# Altium PCB PCB1.PcbDoc (part 1 of 2)
Units mil, origin at the board's own origin, x right, y up, seen from the top; angles counter-clockwise.
Board outline 3297.75 x 2522.53 mil, 2 copper layers (Top Layer, Bottom Layer); 134 components, 99 nets, 411 pads, 89 vias.
Unrouted connection lines stored in the file: 1.
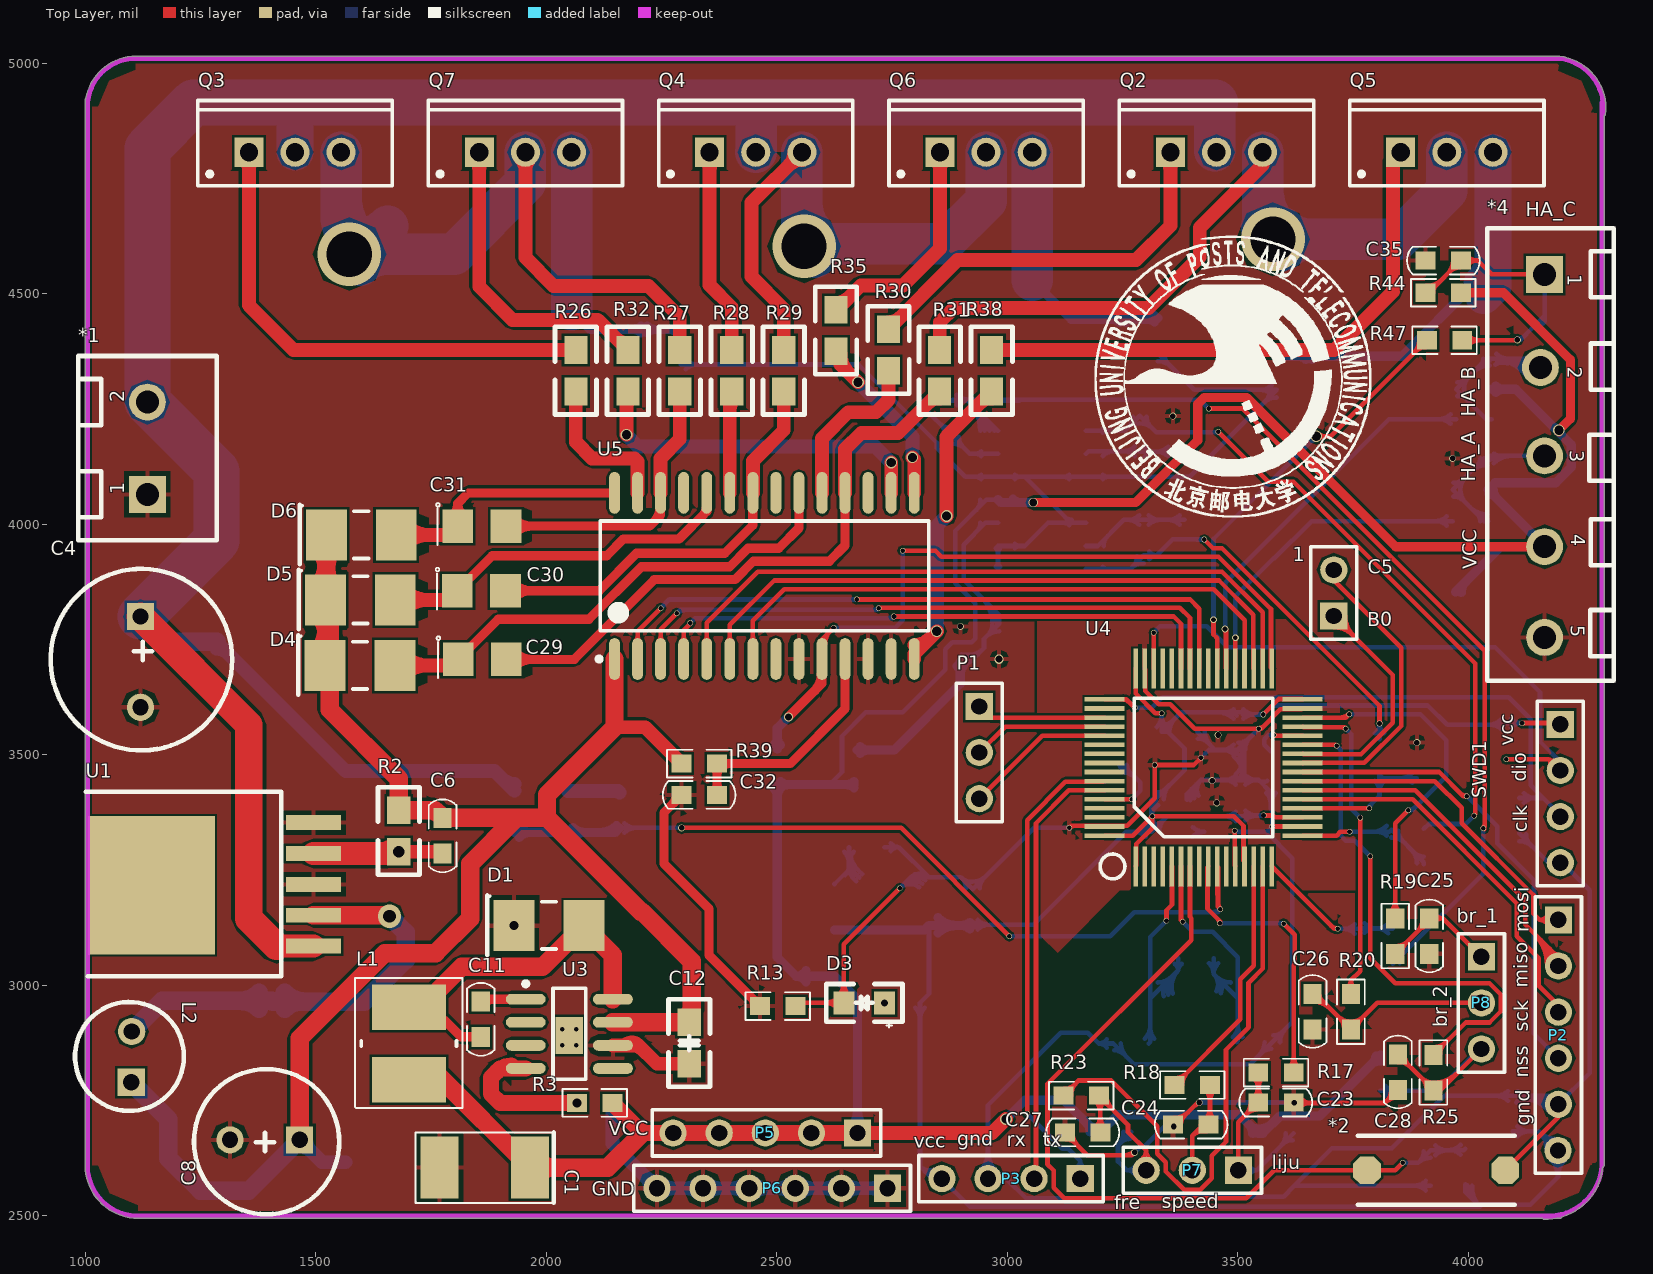
[diagram p0: Top Layer view]
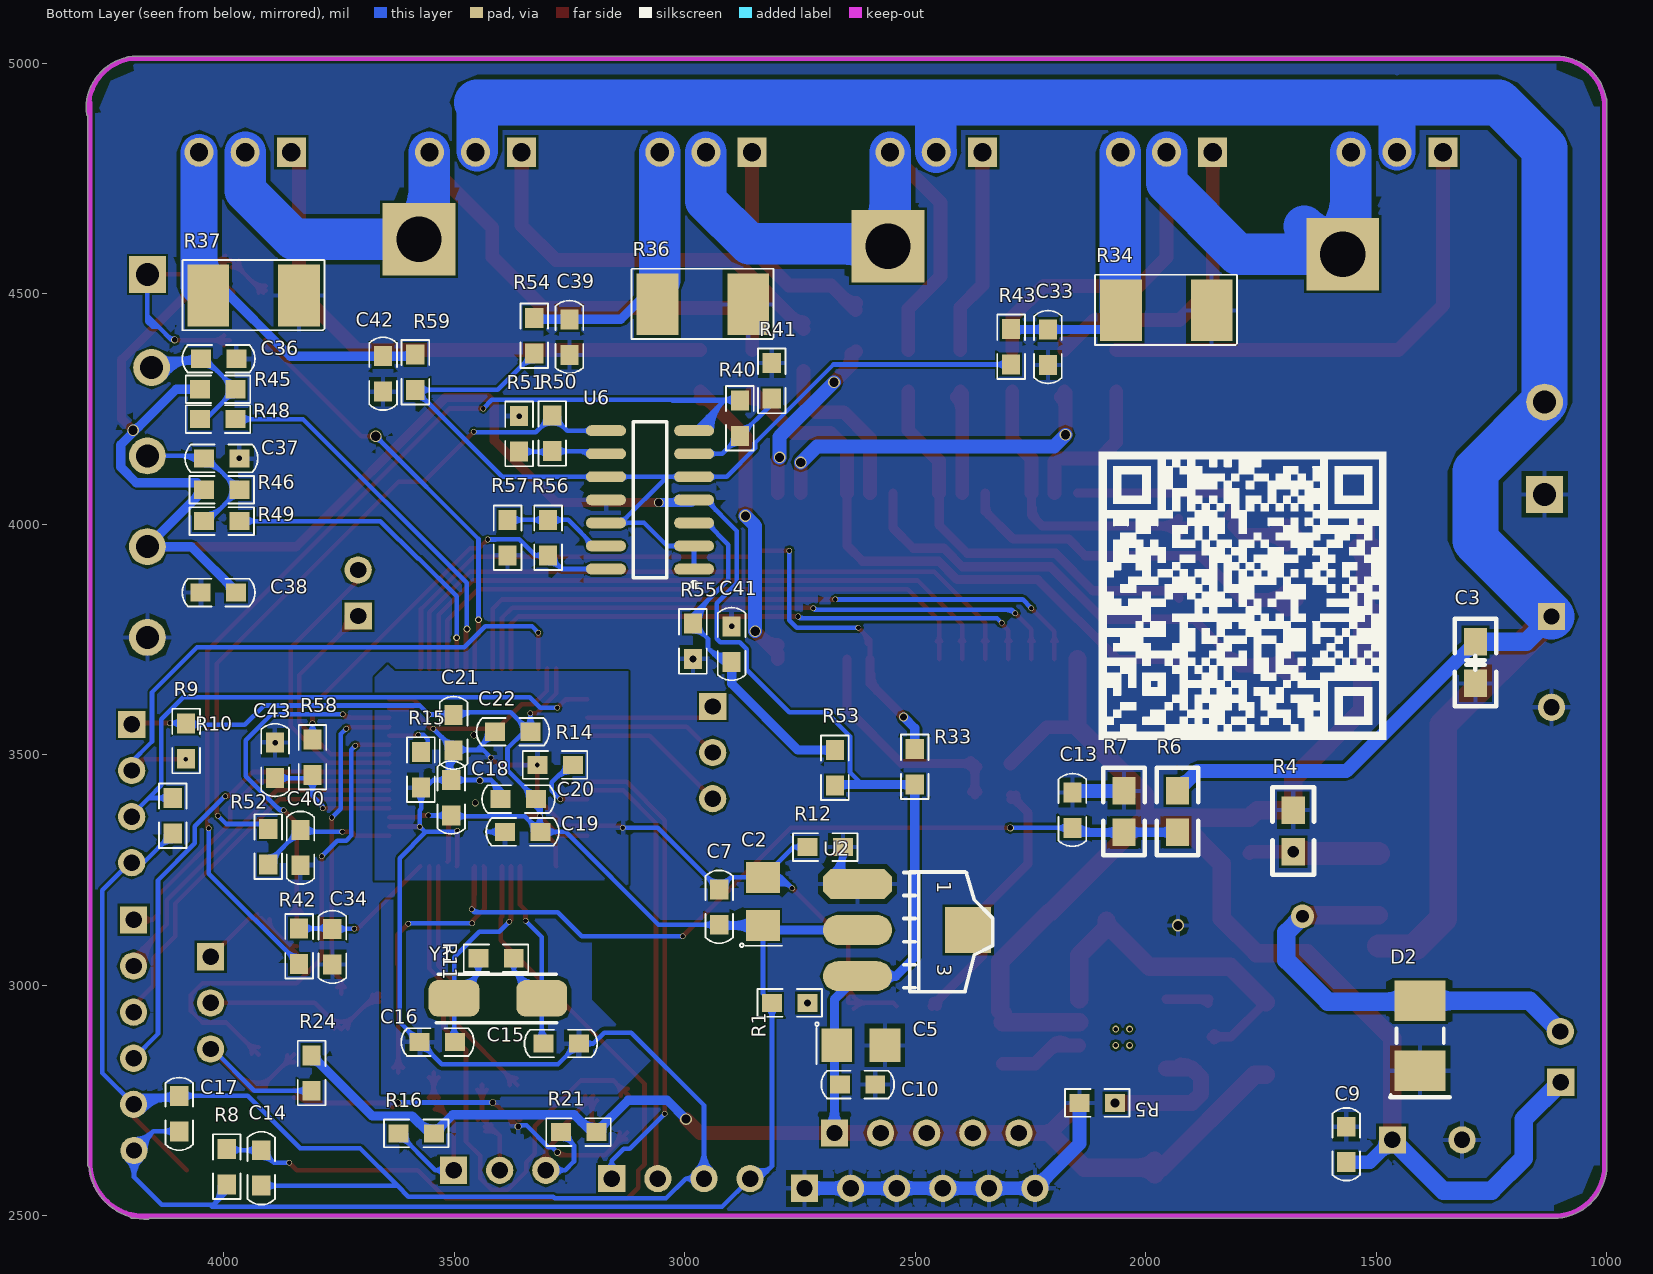
[diagram p1: Bottom Layer view, seen from below]

## Layer stack, top to bottom
Top Layer: signal copper 1.4
Dielectric: dielectric 12.6, FR-4, Dk 4.8
Bottom Layer: signal copper 1.4

## Board outline
1115,2494.99 4161.48,2494.99 ccw(c4164,2495) 4163.95,2492.49 ccw(c4166.5,2617.5) 4191.5,2494.99 4198,2494.99 ccw(c4198,2500) 4202.48,2497.75 ccw(c4166.5,2617.5) 4290.95,2605.38 ccw(c4289,2610) 4294.02,2610 4294.02,4885.41 ccw(c4292,4890) 4296.98,4889.42 ccw(c4184.5,4902.5) 4297.74,4902.5 ccw(c4184.5,4902.5) 4197.58,5014.98 ccw(c4197,5010) 4197.55,5014.98 ccw(c4197,5010) 4197,5015.02 1110,5015.02 ccw(c1110,4905) 1001.58,4923.67 ccw(c1005,4920) 999.99,4920 999.99,2610 999.98,2610 cw(c1005,2610) 999.99,2610.03 999.98,2610 ccw(c1115,2610)

## Design rules (kind name [scope] priority, off if disabled: settings)
Clearance [All] p1: gap=5
PolygonConnect [All] p1: connectstyle=Relief reliefconductorwidth=10 reliefentries=4 polygonreliefangle="90 Angle" airgapwidth=10
RoutingCorners [All] p1: cornerstyle=45-Degree minsetback=20 maxsetback=100
RoutingVias [All] p1: holewidth=28 width=50 viastyle="Through Hole" minholewidth=5 minwidth=12 maxholewidth=28 maxwidth=50
SolderMaskExpansion [All] p1: expansion=4
Width [All] p1: maxlimit=100 minlimit=10 preferedwidth=10
27 further rules are at their usual default settings.

## Classes and differential pairs
component class Drive: *4 C29 C30 C31 C32 C33 C34 C35 C36 C37 C38 C39 C40 C41 C42 C43 D4 D5 D6 Q2 Q3 Q4 Q5 Q6 Q7 R26 R27 R28 R29 R30 R31 R32 R33 R34 R35 R36 R37 R38 R39 R40 R41 R42 R43 R44 R45 R46 R47 R48 R49 R50 R51 R52 R53 R54 R55 R56 R57 R58 R59 U5 U6
component class Zhuban: 1 *1 *2 C1 C2 C3 C4 C5 C6 C7 C8 C9 C10 C11 C12 C13 C14 C15 C16 C17 C18 C19 C20 C21 C22 C23 C24 C25 C26 C27 C28 D1 D2 D3 L1 L2 P1 P2 P3 P5 P6 P7 P8 R1 R2 R3 R4 R5 R6 R7 R8 R9 R10 R11 R12 R13 R14 R15 R16 R17 R18 R19 R20 R21 R23 R24 R25 SWD1 U1 U2 U3 U4 Y1

## Components (designator, comment, footprint, x,y, rotation, side; value= is the part's Value field where it differs from the comment)
1 "Head_2" HDR1X2 3708,3801 r90 top
*1 "Power" 普通二口接线柱 1135,4065 r90 top
*2 "SW" KEY 3930,2599 r180 top locked
*4 "Hall" 普通五口接线柱 4165,4542 r270 top locked
C1 "107UF" "6032C  TA" 1965,2605 r180 top
C2 "47uF  Ta" "3216A  Ta" 2830,3130 r90 bottom
C3 "104" 0805C 1285,3745 r270 bottom
C4 "330uF 63V" "Cap  电解  10mm" 1120,3800 r270 top
C5 "47uF  Ta" "3216A  Ta" 2670,2870 r180 bottom
C6 "104" "0603- C" 1775,3325 r270 top
C7 "104" "0603- C" 2925,3170 r90 bottom
C8 "100uF  50V" "Cap  电解  8mm - duplicate" 1465,2665 r180 top
C9 "104" "0603- C" 1565,2655 r90 bottom
C10 "104" "0603- C" 2625,2785 r180 bottom
C11 "104" "0603- C" 1858,2927 r270 top
C12 "10uf" 0805C 2310,2830 r90 top
C13 "104" "0603- C" 2159,3380 r90 bottom
C14 "0.1uf" "0603- C" 3918,2604 r270 bottom
C15 "20PF" "0603- C" 3268,2874 r0 bottom
C16 "20PF" "0603- C" 3536,2877 r180 bottom
C17 "Cap" "0603- C" 4096,2722 r270 bottom
C18 "0.1UF" "0603- C" 3506,3407 r90 bottom
C19 "Cap" "0603- C" 3351,3333 r0 bottom
C20 "Cap" "0603- C" 3361,3404 r180 bottom
C21 "Cap" "0603- C" 3501,3548 r270 bottom
C22 "Cap" "0603- C" 3373,3550 r180 bottom
C23 "104" "0603- C" 3582.54,2746 r180 top
C24 "104" "0603- C" 3398,2698 r0 top
C25 "104" "0603- C" 3915,3107 r90 top
C26 "104" "0603- C" 3662,2943 r90 top
C27 "104" "0603- C" 3163,2681 r0 top
C28 "104" "0603- C" 3847,2812 r90 top
C29 "钽电容" "3216A  Ta" 1809,3707 r0 top
C30 "钽电容" "3216A  Ta" 1807,3856 r0 top
C31 "钽电容  1Uf" "3216A  Ta" 1808,3996 r0 top
C32 "104" "0603- C" 2332,3413 r180 top
C33 "104" "0603- C" 2212,4384 r90 bottom
C34 "104" "0603- C" 3764,3084 r270 bottom
C35 "104" "0603- C" 3945,4572 r0 top
C36 "104" "0603- C" 4010,4359 r0 bottom
C37 "104" "0603- C" 4004,4143 r0 bottom
C38 "104" "0603- C" 4011,3852 r180 bottom
C39 "104" "0603- C" 3250,4406 r90 bottom
C40 "104" "0603- C" 3833,3299 r270 bottom
C41 "104" "0603- C" 2898,3740 r90 bottom
C42 "104" "0603- C" 3654,4326 r90 bottom
C43 "104" "0603- C" 3888,3488 r90 bottom
D1 "D" "D RS1M" 1930,3130 r0 top
D2 "SS14" "D RS1M" 1405,2815 r90 bottom
D3 "D_2" 0805D 2733.54,2962 r180 top
D4 "RS1M" "D RS1M" 1520,3694 r0 top
D5 "RS1M" "D RS1M" 1521,3836 r0 top
D6 "RS1M  FR107" "D RS1M" 1523,3977 r0 top
L1 "L" CD_54 1702,2874 r270 top
L2 "100uH 500Ma" "L  电感  6mm" 1100,2790 r90 top
P1 "Head_3" HDR1X3 2939,3605 r270 top
P2 "Header 6" "HDR1X6- duplicate" 4195,3142 r270 top
P3 "" HDR1X4 3158,2581 r180 top
P5 "Head_5" HDR1X5 2675,2680 r180 top
P6 "Header 6" HDR1X6 2740,2560 r180 top
P7 "Head_3" HDR1X3 3501,2599 r180 top
P8 "Head_3" HDR1X3 4028,3062 r270 top
Q2 "IRF540NS" "TO-220AB  MOS" 3453.42,4806.86 r0 top
Q3 "IRF540NS" "TO-220AB  MOS" 1455.14,4806.86 r0 top
Q4 "IRF540NS" "TO-220AB  MOS" 2454.28,4806.86 r0 top
Q5 "IRF540NS" "TO-220AB  MOS" 3953,4806.86 r0 top
Q6 "IRF540NS" "TO-220AB  MOS" 2953.85,4806.86 r0 top
Q7 "IRF540NS" "TO-220AB  MOS" 1954.71,4806.86 r0 top
R1 "1K" 0603-R 2772,2962 r0 bottom
R2 "27KK 1%" 0805R 1680,3290 r90 top
R3 "10K" 0603-R 2105,2745 r0 top
R4 "2.4K1%" 0805R 1680,3380 r270 bottom
R5 "3.24K" 0603-R 2105,2745 r0 bottom
R6 "20K" 0805R 1931,3332 r90 bottom
R7 "1K" 0805R 2047,3421.87 r270 bottom
R8 "10K" 0603-R 3993,2607 r270 bottom
R9 "10K" 0603-R 4081,3530 r90 bottom
R10 "10K" 0603-R 4110,3368 r90 bottom
R11 "1M" 0603-R 3409,3059 r180 bottom
R12 "0" 0603-R 2695,3300 r0 bottom
R13 "0" 0603-R 2502,2955 r0 top
R14 "10K" 0603-R 3281,3478 r0 bottom
R15 "10K" 0603-R 3572,3468 r270 bottom
R16 "10K" 0603-R 3582,2679 r180 bottom
R17 "68R" 0603-R 3582.54,2811 r0 top
R18 "68R" 0603-R 3401,2784 r180 top
R19 "68R" 0603-R 3841,3107 r90 top
R20 "68R" 0603-R 3745,2943 r90 top
R21 "10K" 0603-R 3230,2682 r180 bottom
R23 "68R" 0603-R 3160,2761 r180 top
R24 "10K" 0603-R 3809,2810 r90 bottom
R25 "68R" 0603-R 3924,2811 r90 top
R26 "22R" 0805R 2064,4288 r90 top
R27 "68R" 0805R 2289.5,4288 r90 top
R28 "68R" 0805R 2402.25,4288 r90 top
R29 "68R" 0805R 2515,4288 r90 top
R30 "68R" 0805R 2742,4333 r90 top
R31 "68R" 0805R 2853.25,4288 r90 top
R32 "68R" 0805R 2176.75,4288 r90 top
R33 "5K1" 0603-R 2501,3474 r90 bottom
R34 "0.02R 1%  采样电阻" 2512R 1857,4464 r0 bottom
R35 "68R" 0805R 2628,4375 r90 top
R36 "0.002R" 2512R 2862,4477 r0 bottom
R37 "0.002R" 2512R 3836,4496 r0 bottom
R38 "22R" 0805R 2966,4288 r90 top
R39 "68R" 0603-R 2332,3481 r0 top
R40 "2K 1%" 0603-R 2880,4230 r270 bottom
R41 "1K1%" 0603-R 2811,4311 r90 bottom
R42 "1K1%" 0603-R 3836,3085 r270 bottom
R43 "68R" 0603-R 2292,4385 r90 bottom
R44 "10K  1%" 0603-R 3945,4502 r180 top
R45 "10K  1%" 0603-R 4012,4293 r180 bottom
R46 "10K  1%" 0603-R 4004,4075 r180 bottom
R47 "0R" 0603-R 3948,4399 r0 top
R48 "R" 0603-R 4012,4228 r0 bottom
R49 "R" 0603-R 4004,4007 r0 bottom
R50 "2K 1%" 0603-R 3287,4197 r270 bottom
R51 "1K1%" 0603-R 3359,4196 r90 bottom
R52 "1K1%" 0603-R 3903,3301 r90 bottom
R53 "10K  1%" 0603-R 2674,3472 r90 bottom
R54 "1K1%" 0603-R 3326,4409 r90 bottom
R55 "4.7K  1%" 0603-R 2982,3746 r270 bottom
R56 "2K 1%" 0603-R 3296,3971 r90 bottom
R57 "1K1%" 0603-R 3384,3971 r270 bottom
R58 "1K1%" 0603-R 3807,3495 r90 bottom
R59 "1K1%" 0603-R 3584,4330 r90 bottom
SWD1 "Head 4" HDR1X4 4199,3566 r270 top
U1 "LM2576HV—ADJ" LM 1495,3085 r90 top locked
U2 "ASM1117-3.3" AMS1117 2625,3220 r270 bottom
U3 "TPS5430" SOIC-8piN 2050,2895 r0 top
U4 "STM32F103RBT6" LQFP64 3278,3258 r90 top locked
U5 "IR2136" "IR2136S SOIC-28" 2473,3888 r90 top locked
U6 "LM324" SOP-14N 3075,4053 r0 bottom locked
Y1 "8M" OSC-5032 3420,2967 r180 bottom

## Footprints (in the part's own frame and the unit in brackets; to place one, negate y for a bottom-side part, rotate by r counter-clockwise, add the part's x,y. Pads: shape width x height; smd on the part's side, far side on the other; paste and mask are expansions set on the pad)
"0603- C" [mm] "贴片带丝印"
  rect 1.1x1 smd: 1(-0.977,0) 2(0.977,0)
  silkscreen extent -1.99,-0.76 2.02,0.76, body extent -1.14,-0.38 1.14,0.38, height 1
0603-R [mm] "贴片带丝印"
  rect 1.1x1 smd: 1(-0.977,0) 2(0.977,0)
  silkscreen extent -1.78,-0.76 1.78,0.76, body extent -1.14,-0.38 1.14,0.38, height 1
0805C [mil]
  rect 60x50 smd: 1(0,0) 2(90,0)
  silkscreen extent -50,-45 140,45
0805D [mil]
  rect 45x50 smd: A(0,0) K(88,0)
  silkscreen extent -39,-41 126,54
0805R [mil]
  rect 60x50 smd: 1(0,0) 2(90,0)
  silkscreen extent -50,-45 140,45
2512R [mm]
  rect 2.3x3.4 smd: 1(0,0) 2(5,0)
  silkscreen extent -1.4,-1.96 6.43,1.91, body extent -0.7,-1.7 5.7,1.7, height 0.7
"3216A  Ta" [mm] "Chip Capacitor, 2-Leads, Body 3.30x1.70mm, IPC Medium Density"
  rect 1.7x1.85 smd: 1(0,0) 2(2.65,0)
  silkscreen extent -1.19,-1.04 -0.99,1.27, body extent -0.38,-0.9 3.03,0.9, height 1.7
"6032C  TA" [mm]
  rect 2.1x3.4 smd: 1(0,0) 2(5,0)
  silkscreen extent -1.31,-1.93 6.31,1.96, body extent -0.6,-1.7 5.6,1.7, height 2.9
AMS1117 [mil]
  oct 65x150 smd: 1(0.03,-0.06)
  oval 65x150 smd: 2(100.03,-0.06) 3(200.03,-0.06)
  rect 100x100 smd: 4(100.03,239.94)
  silkscreen extent -26,100 234,293
"Cap  电解  8mm - duplicate" [mm] "Connector; Header; 3 Position"
  rect 1.5x1.5 hole 0.9: 1(0,0)
  round 1.5 hole 0.9: 2(3.835,0)
  silkscreen extent -2.18,-3.9 5.82,4.1
"Cap  电解  10mm" [mm] "Connector; Header; 3 Position"
  rect 1.5x1.5 hole 0.9: 1(0,0)
  round 1.5 hole 0.9: 2(5,0)
  silkscreen extent -2.62,-4.95 7.37,5.05
CD_54 [mm]
  rect 2.5x4.064 smd: 1(-2,0) 2(2,0)
  silkscreen extent -3.61,-2.97 3.56,2.95, body extent -3,-2.7 3,2.7, height 4
"D RS1M" [mm]
  rect 2.25x2.8 smd: A(0,0) K(3.85,0)
  silkscreen extent -1.47,-1.63 2.32,1.66, body extent -0.72,-1.4 4.57,1.39, height 2.3
HDR1X2 [mm]
  rect 1.5x1.5 hole 0.9: 1(0,0)
  round 1.5 hole 0.9: 2(2.54,0)
  silkscreen extent -1.27,-1.27 3.81,1.27
HDR1X3 [mm] "Connector; Header; 3 Position"
  rect 1.5x1.5 hole 0.9: 1(0,0)
  round 1.5 hole 0.9: 2(2.54,0) 3(5.08,0)
  silkscreen extent -1.27,-1.27 6.35,1.27
HDR1X4 [mm]
  rect 1.5x1.5 hole 0.9: 1(0,0)
  round 1.5 hole 0.9: 2(2.54,0) 3(5.08,0) 4(7.62,0)
  silkscreen extent -1.27,-1.27 8.89,1.27
HDR1X5 [mm]
  rect 1.5x1.5 hole 0.9: 1(0,0)
  round 1.5 hole 0.9: 2(2.54,0) 3(5.08,0) 4(7.62,0) 5(10.16,0)
  silkscreen extent -1.27,-1.27 11.3,1.27
HDR1X6 [mm]
  rect 1.5x1.5 hole 0.9: 1(0,0)
  round 1.5 hole 0.9: 2(2.54,0) 3(5.08,0) 4(7.62,0) 5(10.16,0) 6(12.7,0)
  silkscreen extent -1.27,-1.27 13.97,1.27
"HDR1X6- duplicate" [mm]
  rect 1.5x1.5 hole 0.9: 1(0,0)
  round 1.5 hole 0.9: 2(2.54,0) 3(5.08,0) 4(7.62,0) 5(10.16,0) 6(12.7,-0.025)
  silkscreen extent -1.27,-1.27 13.94,1.27
"IR2136S SOIC-28" [mm] "SOIC, 28-Leads, Body 17.90x7.50mm, Pitch 1.27mm, IPC Medium Density"
  oval 2.3x0.6 smd: 1(-4.575,8.255) 2(-4.575,6.985) 3(-4.575,5.715) 4(-4.575,4.445) 5(-4.575,3.175) 6(-4.575,1.905) 7(-4.575,0.635) 8(-4.575,-0.635) 9(-4.575,-1.905) 10(-4.575,-3.175) 11(-4.575,-4.445) 12(-4.575,-5.715) 13(-4.575,-6.985) 14(-4.575,-8.255) 15(4.575,-8.255) 16(4.575,-6.985) 17(4.575,-5.715) 18(4.575,-4.445) 19(4.575,-3.175) 20(4.575,-1.905) 21(4.575,-0.635) 22(4.575,0.635) 23(4.575,1.905) 24(4.575,3.175) 25(4.575,4.445) 26(4.575,5.715) 27(4.575,6.985) 28(4.575,8.255)
  silkscreen extent -4.7,-9.05 3.03,9.23, body extent -3.8,-9.05 3.8,9.05, height 2.65
KEY [mil]
  oct 60x60 smd: 1(-150,0) 2(150,0)
  silkscreen extent -170,-75 170,75
"L  电感  6mm" [mm] "Connector; Header; 3 Position"
  rect 1.5x1.5 hole 0.9: 1(0,0)
  round 1.5 hole 0.9: 2(2.794,-0.025)
  silkscreen extent -1.58,-2.9 4.42,3.1
LM [mil]
  rect 32.4x120 smd: 1(0,0)
  rect 32x120 smd: 2(67,0) 3(134,0) 4(201,0) 5(268,0)
  rect 300x275.59 smd: 6(132,351)
  silkscreen extent -65,70 335,494
LQFP64 [mm]
  rect 2.2x0.254 smd: 1(0,0) 2(0,-0.5) 3(0,-1) 4(0,-1.5) 5(0,-2) 6(0,-2.5) 7(0,-3) 8(0,-3.5) 9(0,-4) 10(0,-4.5) 11(0,-5) 12(0,-5.5) 13(0,-6) 14(0,-6.5) 15(0,-7) 16(0,-7.5) 33(10.9,-7.5) 34(10.9,-7) 35(10.9,-6.5) 36(10.9,-6) 37(10.9,-5.5) 38(10.9,-5) 39(10.9,-4.5) 40(10.9,-4) 41(10.9,-3.5) 42(10.9,-3) 43(10.9,-2.5) 44(10.9,-2) 45(10.9,-1.5) 46(10.9,-1) 47(10.9,-0.5) 48(10.9,0)
  rect 0.254x2.2 smd: 17(1.7,-9.2) 18(2.2,-9.2) 19(2.7,-9.2) 20(3.2,-9.2) 21(3.7,-9.2) 22(4.2,-9.2) 23(4.7,-9.2) 24(5.2,-9.2) 25(5.7,-9.2) 26(6.2,-9.2) 27(6.7,-9.2) 28(7.2,-9.2) 29(7.7,-9.2) 30(8.2,-9.2) 31(8.7,-9.2) 32(9.2,-9.2) 49(9.2,1.7) 50(8.7,1.7) 51(8.2,1.7) 52(7.7,1.7) 53(7.2,1.7) 54(6.7,1.7) 55(6.2,1.7) 56(5.7,1.7) 57(5.2,1.7) 58(4.7,1.7) 59(4.2,1.7) 60(3.7,1.7) 61(3.2,1.7) 62(2.7,1.7) 63(2.2,1.7) 64(1.7,1.7)
  silkscreen extent -0.68,-7.56 9.26,1.95
OSC-5032 [mil] "Molded Capacitor, 2-Leads, Body 3.20x1.60mm, IPC Medium Density"
  rrect50% 110.24x78.74 smd: 1(-80,5) 2(110,5)
  silkscreen extent -118,-48 143,57, body extent -65,-30 106,41, height 71
SOIC-8piN [mm] "SOIC, 8-Leads, Body 4.90x3.90mm, Pitch 1.27mm, IPC Medium Density"
  rect 1.528x2.036 smd: 0(0,-0.102)
  oval 2.2x0.6 smd: 1(-2.4,1.905) 2(-2.4,0.635) 3(-2.4,-0.635) 4(-2.4,-1.905) 5(2.4,-1.905) 6(2.4,-0.635) 7(2.4,0.635) 8(2.4,1.905)
  silkscreen extent -2.52,-2.5 0.9,2.88, body extent -2,-2.5 2,2.5, height 1.7
SOP-14N [mm]
  oval 2.2x0.6 smd: 1(-2.425,3.81) 2(-2.425,2.54) 3(-2.425,1.27) 4(-2.425,0) 5(-2.425,-1.27) 6(-2.425,-2.54) 7(-2.425,-3.81) 8(2.425,-3.81) 9(2.425,-2.54) 10(2.425,-1.27) 11(2.425,0) 12(2.425,1.27) 13(2.425,2.54) 14(2.425,3.81)
  silkscreen extent -2.55,-4.3 0.93,4.78, body extent -2,-4.28 2,4.28, height 1.75
"TO-220AB  MOS" [mm]
  round 1.6 hole 1: D(0,0) S(2.54,0)
  rect 1.6x1.6 hole 1: G(-2.54,0)
  silkscreen extent -5.35,-1.85 5.35,2.85, body extent -5.4,-1.9 5.4,2.9, height 19.3
普通二口接线柱 [mil]
  rect 80x80 hole 50: 1(0,0)
  round 80 hole 50: 2(200,0)
  silkscreen extent -100,-150 300,150
普通五口接线柱 [mil]
  rect 80x80 hole 50: 1(0,0)
  round 80 hole 50: 2(202,-9) 3(393.7,0) 4(590.55,0) 5(787.4,0)
  silkscreen extent -100,-124 881,150

## Part data
1: library part "Head_2  Power"
*1: library part Head_2
*2: "开关"
*4: library part Head_5
C1 C31: library part Cap_2, "钽电容"
C2 C4 C5 C8: library part Cap_1
C3 C6 C7 C9 C10 C11 C12 C13 C14 C18 C23 C24 C25 C26 C27 C28 C32 C33 C34 C39 C40 C41 C42 C43: library part Cap
C15 C16 C35 C36 C37 C38: library part C
C29 C30: library part Cap_2
D2 D4 D5 D6: library part D_1, "二极管"
D3: "发光二极管"
L1: "电感"
L2: library part L, "电感"
P2: "接插件"
P3 SWD1: library part Head_4
P6: "Header, 6-Pin"
Q2 Q3 Q4 Q5 Q6 Q7: "MOS"
R1 R2 R3 R4 R5 R6 R7 R8 R11 R12 R13 R14 R15 R16 R17 R18 R19 R20 R21 R23 R24 R25 R26 R27 R28 R29 R30 R31 R32 R33 R34 R35 R36 R37 R38 R39 R40 R41 R42 R43 R44 R45 R46 R47 R50 R51 R52 R53 R54 R55 R56 R57 R58 R59: library part R
R9 R10: library part R, "510"
U2: "3.3 稳压"
U6: "4运放SOP8芯片"
Y1: library part C-Osc, "Crystal Oscillator"

## Free pads (board coordinates)
  rect 157.48x157.48 smd far side: 0(1573,4586) 1(2559,4603) 2(3576,4618)

## Via types
v1: diameter 12, hole 10, Top Layer to Bottom Layer, 49 vias
v2: diameter 15, hole 12, Top Layer to Bottom Layer, 13 vias
v3: diameter 25, hole 20, Top Layer to Bottom Layer, 9 vias
v4: diameter 15, hole 10, Top Layer to Bottom Layer, 7 vias
v5: diameter 20, hole 15, Top Layer to Bottom Layer, 3 vias
v6: diameter 137.8, hole 98.43, Top Layer to Bottom Layer, 3 vias
v7: diameter 27, hole 20, Top Layer to Bottom Layer, 1 vias
v8: diameter 20, hole 17, Top Layer to Bottom Layer, 1 vias
v9: diameter 25, hole 20, Top Layer to Bottom Layer, tented top, 1 vias
v10: diameter 50, hole 28, Top Layer to Bottom Layer, 1 vias
v11: diameter 30, hole 25, Top Layer to Bottom Layer, 1 vias

## Nets (pads, with @x,y where several pads share a name; then routed paths per layer and width w, separated by ;. In a path a pad name is that pad's centre, name@x,y a point inside that pad or via, vN(x,y) a via of type N, cw(c..) or ccw(c..) an arc to the next point about the centre after c; other vN are vias at no path point)
"BOOT 0": R14.1 U4.60 | length 238.4
  Top Layer w10: U4.60@3211.07,3403.67 3269.33,3403.67 v1(3269.66,3404)
  Bottom Layer w10: R14.1@3242.54,3478 3250,3478 3287.88,3440.12 3287.88,3422.22 v1(3269.66,3404) ; R14.1@3244.5,3463.32 cw(c3244.5,3414.59) 3278.96,3449.04 ; R14.1@3244.5,3473.32 cw(c3244.5,3448.74) R14.1@3261.88,3466.12 ; R14.1@3259.19,3478 ccw(c3281.37,3478) 3265.69,3462.31
"BOOT 1": R15.1 U4.28 | length 127.3
  Top Layer w10: v1(3578,3543) 3579.54,3541.46 U4.28@3640.2,3541.46 ; v1@3578.71,3543.71 ccw(c3584.12,3549.12) 3584.12,3541.46
  Bottom Layer w10: R15.1@3572,3506.46 3557,3521.46 3557,3534 3566,3543 v1(3578,3543)
BREAK_1: R19.2 U4.30 | length 872
  Top Layer w10: U4.30@3640.2,3580.83 3733.83,3580.83 v1(3741,3588) ; 3721.28,3580.83 ccw(c3721.28,3607.72) v1@3740.29,3588.71 ; R19.2@3830.62,3157.82 ccw(c3805.55,3182.89) 3841,3182.89 ccw(c3876.45,3182.89) R19.2@3851.38,3157.82 ; R19.2@3841,3145.46 3841,3352 v1(3869,3380)
  Bottom Layer w10: v1(3741,3588) 3896,3588 3952,3532 3952,3453.81 3878.19,3380 v1(3869,3380) ; v1@3869,3381 ccw(c3869,3405.6) 3886.39,3388.2
BREAK_2: R20.2 U4.29 | length 737
  Top Layer w10: U4.29@3640.21,3561.15 3641.89,3559.46 3731.54,3559.46 v1(3734,3557) ; 3725.64,3559.46 cw(c3725.64,3548.64) v1@3733.29,3556.29 ; R20.2@3736.81,2995.62 ccw(c3726.47,3011) 3745,3011 ; R20.2@3745,2981.46 3745,3011 ; R20.2@3753.19,2995.62 cw(c3763.53,3011) 3745,3011 ; v1(3765,3364) 3765,3031 3745,3011
  Bottom Layer w10: v1(3734,3557) 3745.78,3545.22 3745.78,3383.22 v1(3765,3364)
EN_IR: R33.2 U4.33 U5.10 | length 1710.8
  Top Layer w10: U5.10@2598,3707.88 2598,3751 v1(2623,3776) ; U5.10@2604.81,3741.35 cw(c2644.56,3741.35) 2616.45,3769.45 ; v1(2773,3943) 2844,3943 2857,3930 3457.91,3930 3571.59,3816.32 3571.59,3688.82 U4.33@3573.27,3687.13
  Top Layer w20: v5(2525,3582) 2598,3655 U5.10@2598,3707.88 ; 2581.18,3638.18 ccw(c2544.94,3674.42) U5.10@2596.19,3674.42
  Bottom Layer w10: v1(2623,3776) 2756.87,3776 2773,3792.13 v1(2773,3943)
  Bottom Layer w20: R33.2@2494.15,3521.28 ccw(c2477.62,3537.81) 2501,3537.81 ccw(c2524.38,3537.81) R33.2@2507.85,3521.28 ; R33.2@2501,3512.46 2501,3558 v5(2525,3582)
FAULT: U4.40 U5.8
FM: U4.11
FREQUENT: R17.2 U4.9 | length 672.1
  Top Layer w10: U4.9@3435.48,3258 3434,3256.52 3434,3166 3461,3139 v1(3461,3135) ; 3456.46,3143.54 cw(c3447.93,3135) v1@3460,3135 ; v1(3599,3134) 3623,3110 3623,3046 3621,3044 R17.2@3621,2811 ; R17.2@3610.62,2821.38 ccw(c3585.55,2846.45) 3621,2846.45 ccw(c3656.45,2846.45) R17.2@3631.38,2821.38
  Bottom Layer w10: v1(3461,3135) 3598,3135 v1(3599,3134)
GND: *2.1 C2.2 C7.2 C14.2 C15.1 C16.1 C17.1 C18.2 C19.2 C20.1 C21.2 C22.1 D3.K P2.5 P3.3 R10.1 R12.2 R13.2 R14.2 R15.2 SWD1.4 U4.12 U4.18 U4.31 U4.47 U4.63 | length 8714.2
  Top Layer w10: R13.2@2540.46,2955 2547.46,2962 D3.K@2645.54,2962 2645.54,3089.54 v1(2767,3211) ; D3.K@2633.16,2949.63 ccw(c2603.29,2919.75) 2603.29,2962 ccw(c2603.29,3004.25) D3.K@2633.16,2974.37 ; D3.K@2633.16,2976.87 ccw(c2603.29,3006.75) 2645.54,3006.75 ccw(c2687.78,3006.75) D3.K@2657.91,2976.87 ; P3.3@2947.5,2570.5 P3.3@2959,2559 ; v1(3134,3342) 3138.3,3346.3 3259.76,3346.3 3319.46,3406 v1(3319.46,3478) 3404,3478 v1(3420,3494) ; v1@3134.71,3341.29 cw(c3146.79,3329.21) 3146.79,3346.3 ; U4.47@3297.69,3687.13 3299.37,3685.45 3299.37,3638.44 3328.35,3609.46 3353.54,3609.46 3406,3557 v1(3545,3557) 3550.87,3557 3573.46,3579.59 3573.46,3580.79 3591.51,3598.83 3638.52,3598.83 U4.31@3640.2,3600.52 ; v1(3493,3335) 3493,3259.54 U4.12@3494.54,3258 ; v1@3545,3558 ccw(c3545,3574.59) 3556.73,3562.86 ; v1(3574,3344) 3574.61,3344.61 U4.18@3640.2,3344.61 ; *2.1@4080,2599 4195,2714 P2.5@4195,2742
  Bottom Layer w10: R12.2@2733.46,3300 2764.33,3300 ; R12.2@2747.3,3291.34 cw(c2764.33,3278.91) 2764.33,3300 ; R12.2@2747.3,3308.66 ccw(c2764.33,3321.09) 2764.33,3300 ; 2774.66,3218.66 cw(c2795.74,3197.58) C2.2@2815.07,3220.27 ; 2782.32,3226.32 cw(c2802.79,3205.85) C2.2@2821.56,3227.89 ; 2789.98,3233.98 cw(c2809.83,3214.12) C2.2@2828.04,3235.5 ; C2.2@2799.48,3227.24 ccw(c2790.33,3224.88) 2790.33,3234.33 ; C2.2@2799.48,3241.42 cw(c2790.33,3243.78) 2790.33,3234.33 ; C2.2@2808.59,3212.66 ccw(c2788.69,3189.31) v1(2767,3211) 2790.33,3234.33 ; 2901.32,3232.14 cw(c2879.61,3210.43) C7.2@2910.32,3210.43 ; C7.2@2923.95,3225.08 cw(c2921.66,3256.86) 2899.14,3234.33 ; C7.2@2925,3225.12 ccw(c2925,3265.32) 2953.43,3236.89 ; C7.2@2939.68,3210.43 cw(c2970.39,3210.43) 2948.68,3232.14 ; P3.3@2940.66,2598.34 ccw(c2898.79,2640.21) 2958,2640.21 ccw(c3017.21,2640.21) P3.3@2975.34,2598.34 ; P3.3@2947.73,2591.27 ccw(c2922.93,2616.07) 2958,2616.07 ccw(c2993.07,2616.07) P3.3@2968.27,2591.27 ; P3.3@2979.9,2569.95 cw(c2997.86,2560.88) 2997.86,2581 ; P3.3@2979.9,2592.05 ccw(c2997.86,2601.12) 2997.86,2581 ; v1(3134,3342) 3058.54,3342 C7.2@2925,3208.46 2899.13,3234.33 ; C15.1@3215.87,2865.13 ccw(c3198,2851.58) 3198,2874 ; C15.1@3215.87,2882.87 cw(c3198,2896.42) 3198,2874 ; C15.1@3231.5,2859.32 cw(c3231.5,2828.61) 3253.21,2850.32 ; C15.1@3246.19,2874 ccw(c3286.39,2874) 3257.96,2845.57 ; C20.1@3389.46,3403 3389.46,3415.46 3419.46,3445.46 ; C20.1@3396.75,3401.49 cw(c3415.37,3411.48) 3400.43,3426.43 ; C19.2@3401.82,3322.62 cw(c3426.89,3297.55) 3426.89,3333 cw(c3426.89,3368.45) C19.2@3401.82,3343.38 ; C20.1@3405.56,3406.22 cw(c3427.76,3418.13) 3409.95,3435.95 ; C22.1@3411.46,3550 3450.93,3510.54 ; C22.1@3413.43,3535.32 cw(c3413.43,3504.61) 3435.14,3526.32 ; C20.1@3414.37,3410.94 cw(c3440.15,3424.78) 3419.46,3445.46 ; v1(3420,3494) 3436.54,3510.54 3450.93,3510.54 ; C22.1@3428.12,3550 ccw(c3468.32,3550) 3439.89,3521.57 ; 3434.43,3445.46 cw(c3434.43,3434.43) v2@3442.23,3442.23 ; v2@3445.77,3442.23 cw(c3453.57,3434.43) 3453.57,3445.46 ; 3463.21,3510.54 ccw(c3463.21,3549.29) C21.2@3490.62,3521.89 ; 3467.89,3510.54 cw(c3467.89,3478.39) C21.2@3490.62,3501.12 ; C21.2@3491.01,3496.8 cw(c3442.14,3444.12) C18.2@3514,3444.12 ; v1@3493,3333 3561,3333 ; C18.2@3495.62,3435.08 ccw(c3470.55,3410.01) 3470.55,3445.46 ccw(c3470.55,3480.92) C18.2@3495.62,3455.85 ; C18.2@3495.62,3457.82 ccw(c3451.23,3502.2) C21.2@3514,3502.2 ; C21.2@3497.81,3504.13 cw(c3463.4,3467.04) C18.2@3514,3467.04 ; C21.2@3501,3509.54 C21.2@3501,3510.54 ; C21.2@3501,3526.19 ccw(c3501,3558.03) 3523.51,3535.51 ; C18.2@3502.69,3450.75 ccw(c3475.38,3478.06) 3514,3478.06 ; C21.2@3504.61,3511.46 cw(c3484.66,3489.96) C21.2@3514,3489.96 ; 3507.75,3467.43 ccw(c3519.34,3470.54) C18.2@3513.34,3460.15 ; C21.2@3515.68,3511.5 cw(c3554.75,3511.5) 3527.13,3539.13 ; C18.2@3516.38,3435.08 cw(c3541.45,3410.01) 3541.45,3445.46 cw(c3541.45,3480.92) C18.2@3516.38,3455.85 ; v1(3545,3557) 3501,3513 C21.2@3501,3510.54 ; 3546.04,2848.57 ccw(c3517.61,2877) C16.1@3557.81,2877 ; 3550.79,2853.32 cw(c3572.5,2831.61) C16.1@3572.5,2862.32 ; R15.2@3561.62,3417.18 cw(c3538.96,3394.53) 3571,3394.53 ; R15.2@3563.74,3443.65 cw(c3555.24,3456.17) 3544.54,3445.46 ; 3571,3389.7 cw(c3609.87,3389.7) R15.2@3582.38,3417.18 ; v1(3574,3344) 3563,3333 3561,3333 ; v1@3574.46,3346.46 3574.46,3379.87 3571,3383.33 3571,3419 3544.54,3445.46 ; C16.1@3576.43,2891.68 ccw(c3576.43,2922.39) 3598.14,2900.68 ; C16.1@3591.12,2877 cw(c3631.32,2877) 3602.89,2905.43 ; C14.2@3907.62,2555.15 ccw(c3882.55,2530.08) 3882.55,2565.54 ccw(c3882.55,2600.99) C14.2@3907.62,2575.92 ; C14.2@3918,2565.54 3622.54,2565.54 ; C17.1@4085.62,2750.08 ccw(c4060.55,2725.01) 4060.55,2760.46 ccw(c4060.55,2795.92) C17.1@4085.62,2770.85 ; C17.1@4103.79,2746.05 cw(c4126.08,2710.44) 4135.5,2751.38 ; C17.1@4106.38,2750.08 cw(c4131.45,2725.01) 4131.45,2760.46 cw(c4131.45,2795.92) C17.1@4106.38,2770.85 ; C17.1@4108.45,2766.29 ccw(c4132.95,2781.62) 4126.46,2753.46 ; R10.1@4110,3312.88 cw(c4110,3272.68) 4138.43,3301.11 ; R10.1@4110,3333.46 R10.1@4110,3329.54 SWD1.4@4173.54,3266 ; 4119.03,2760.46 cw(c4119.03,2671.03) P2.5@4184.38,2732.08 ; R10.1@4124.68,3327.57 ccw(c4155.39,3327.57) 4133.68,3305.86 ; 4142.06,2760.46 cw(c4142.06,2692.54) P2.5@4191.69,2738.91 ; 4165.08,2760.46 cw(c4165.08,2714.05) P2.5@4199,2745.74 ; P2.5@4177.08,2725.26 ccw(c4096,2649.52) C17.1@4096,2760.46 ; SWD1.4@4199,3266 4203,3266 4263,3206 4263,2810 P2.5@4195,2742 4176.54,2760.46 C17.1@4096,2760.46 ; 2764.33,3300 C2.2@2830,3234.33 ; 2790.33,3234.33 C2.2@2830,3234.33 ; C2.2@2830,3234.33 2899.13,3234.33 ; 2997.86,2581 3040.38,2538.47 3281.47,2538.47 3285,2542 3599,2542 3622.54,2565.54 ; 2997.86,2581 P3.3@2958,2581 2958,2740 3115.54,2897.54 3174.46,2897.54 3198,2874 ; 3198,2874 C15.1@3229.54,2874 3274.54,2829 3526.46,2829 C16.1@3574.46,2877 3618,2920.54 3618,3276 3561,3333 ; 3419.46,3445.46 C18.2@3514,3445.46 ; 3450.93,3510.54 C21.2@3501,3510.54 ; C21.2@3501,3510.54 3511,3510.54 3514,3507.54 C18.2@3514,3445.46 ; C18.2@3514,3445.46 3544.54,3445.46 ; 3622.54,2565.54 3704,2647 3834,2647 3947.46,2760.46 C17.1@4096,2760.46
  other v2: 3454,3396 3444,3444 3457,3543
"HALL A": R49.1 U4.37 | length 750.8
  Top Layer w10: U4.37@3494.54,3687.13 v4(3494.54,3754)
  Bottom Layer w10: v4(3494.54,3754) 3494.54,3843.54 3576,3925 3578,3925 3660,4007 R49.1@3965.54,4007 ; R49.1@3953.18,3996.62 ccw(c3928.11,3971.55) 3928.11,4007 ccw(c3928.11,4042.45) R49.1@3953.18,4017.38
"HALL B": R48.1 U4.38 | length 901.2
  Top Layer w10: v4@3470.23,3771.23 cw(c3461.05,3762.05) 3474.04,3762.05 ; v4(3472,3773) 3474.04,3770.96 3474.04,3687.95 U4.38@3474.85,3687.13
  Bottom Layer w10: v4(3472,3773) 3472.5,3773.5 3472.5,3872.96 3827.54,4228 R48.1@3973.54,4228 ; R48.1@3961.18,4217.62 ccw(c3936.11,4192.55) 3936.11,4228 ccw(c3936.11,4263.45) R48.1@3961.18,4238.38
"HALL C": R47.1 U4.39 | length 1037.9
  Top Layer w10: v4(3447,3793) 3447,3761 3455.17,3752.83 U4.39@3455.17,3687.13 ; v3(3670,4191) 3701.54,4191 R47.1@3909.54,4399 ; v3@3675.3,4185.7 cw(c3688.11,4172.89) 3688.11,4191 cw(c3688.11,4209.11) v3@3675.3,4196.3 ; 3881.11,4370.57 ccw(c3852.68,4399) R47.1@3892.88,4399 ; 3885.86,4375.32 cw(c3907.57,4353.61) R47.1@3907.57,4384.32
  Bottom Layer w10: v4(3447,3793) 3447,3968 v3(3670,4191) ; v3@3662.5,4191 cw(c3644.39,4191) 3657.2,4178.2 cw(c3670,4165.39) v3@3670,4183.5
I_MOTOR_1: C34.1 R42.1 U4.16 | length 502.8
  Top Layer w10: U4.16@3573.27,3258 3708.81,3122.46 v1(3716.46,3122.46) ; 3701.69,3129.58 ccw(c3716.46,3144.36) v1@3716.46,3123.46
  Bottom Layer w10: v1(3716.46,3122.46) C34.1@3764,3122.46 3765,3123.46 R42.1@3836,3123.46 ; C34.1@3753.62,3112.08 ccw(c3728.55,3087.01) 3728.55,3122.46 ccw(c3728.55,3157.92) C34.1@3753.62,3132.85 ; C34.1@3774.38,3114.05 cw(c3797.11,3091.32) 3797.11,3123.46 ; C34.1@3774.38,3134.82 ccw(c3801.79,3162.22) 3801.79,3123.46 ; R42.1@3825.62,3113.08 ccw(c3800.55,3088.01) 3800.55,3123.46 ccw(c3800.55,3158.92) R42.1@3825.62,3133.85
I_MOTOR_2: C40.1 R52.1 U4.17 | length 469
  Top Layer w10: U4.17@3640.2,3324.93 3713.93,3324.93 3722,3333 v1(3742,3333)
  Bottom Layer w10: v1(3742,3333) 3828.54,3333 C40.1@3833,3337.46 3903,3267.46 R52.1@3903,3262.54 ; 3791.52,3333 ccw(c3791.52,3376.97) C40.1@3822.62,3345.88 ; 3803.57,3333 cw(c3803.57,3306.07) C40.1@3822.62,3325.11 ; C40.1@3833,3320.81 cw(c3833,3280.61) 3861.43,3309.04 ; C40.1@3847.68,3335.5 ccw(c3878.39,3335.5) 3856.68,3313.79 ; 3875.84,3294.63 cw(c3845.72,3264.5) R52.1@3888.32,3264.5 ; 3882.99,3287.48 ccw(c3903,3307.49) R52.1@3903,3279.19
I_MOTOR_3: C43.1 R58.1 U4.20 | length 433.2
  Top Layer w10: U4.20@3640.2,3383.98 v1(3785.02,3383.98)
  Bottom Layer w10: v1(3785.02,3383.98) 3785.02,3389.02 3807,3411 R58.1@3807,3456.54 3814,3449.54 C43.1@3888,3449.54 ; v1@3786.02,3383.98 cw(c3800.58,3383.98) 3790.28,3394.28 ; R58.1@3796.62,3444.18 cw(c3771.55,3419.11) 3807,3419.11 cw(c3842.45,3419.11) R58.1@3817.38,3444.18 ; C43.1@3877.62,3439.15 ccw(c3852.55,3414.08) 3852.55,3449.54 ccw(c3852.55,3484.99) C43.1@3877.62,3459.92
I_SENSOR_1: C33.2 Q7.S R34.2 R43.2 | length 709.2
  Bottom Layer w20: R34.2@2053.85,4464 2095.39,4422.46 C33.2@2212,4422.46 2291,4422.46 R43.2@2292,4423.46 ; C33.2@2205.15,4415.62 ccw(c2188.62,4399.08) 2188.62,4422.46 ccw(c2188.62,4445.85) C33.2@2205.15,4429.31 ; C33.2@2218.85,4415.62 cw(c2235.38,4399.08) 2235.38,4422.46 cw(c2235.38,4445.85) C33.2@2218.85,4429.31 ; 2266.28,4422.46 cw(c2266.28,4395.78) R43.2@2285.15,4414.65 ; 2270.96,4422.46 ccw(c2270.96,4442.54) R43.2@2285.15,4428.34
  Bottom Layer w60: R34.2@2053.85,4464 R34.2@2054.71,4464.86
  Bottom Layer w90: R34.2@2054.71,4464.86 Q7.S@2054.71,4806.86
I_SENSOR_2: C39.2 Q6.S R36.2 R54.2 | length 696.4
  Bottom Layer w20: R36.2@3055.85,4527 3138.39,4444.46 C39.2@3250,4444.46 3323,4444.46 R54.2@3326,4447.46 ; C39.2@3243.15,4437.62 ccw(c3226.62,4421.08) 3226.62,4444.46 ccw(c3226.62,4467.85) C39.2@3243.15,4451.31 ; C39.2@3256.85,4437.62 cw(c3273.38,4421.08) 3273.38,4444.46 cw(c3273.38,4467.85) C39.2@3256.85,4451.31 ; 3300.13,4444.46 ccw(c3300.13,4471.37) R54.2@3319.15,4452.34 ; 3305.11,4444.46 cw(c3305.11,4424.6) R54.2@3319.15,4438.65
  Bottom Layer w60: R36.2@3053.85,4529 R36.2@3055.85,4527
  Bottom Layer w90: R36.2@3053.85,4529 Q6.S@3053.85,4806.86
I_SENSOR_SUM: C42.2 Q5.S R37.2 R59.2 | length 972.1
  Bottom Layer w20: R59.2@3584,4368.46 3588,4364.46 C42.2@3654,4364.46 3855.46,4364.46 R37.2@4009.93,4518.93 ; R59.2@3590.85,4373.34 ccw(c3612.29,4394.78) 3612.29,4364.46 ; C42.2@3647.15,4357.62 ccw(c3630.62,4341.08) 3630.62,4364.46 ccw(c3630.62,4387.85) C42.2@3647.15,4371.31 ; C42.2@3660.85,4357.62 cw(c3677.38,4341.08) 3677.38,4364.46 cw(c3677.38,4387.85) C42.2@3660.85,4371.31
  Bottom Layer w80: R37.2@4029.12,4521.38 ccw(c3971.48,4579.02) 4053,4579.02 ; R37.2@4032.85,4496 4053,4516.15 Q5.S@4053,4806.86
KEY_1: P1.1 U4.51 | length 282.1
  Top Layer w10: P1.1@2939,3605 2963.17,3580.83 U4.51@3211.07,3580.83
KEY_2: P1.2 U4.52 | length 295.3
  Top Layer w10: P1.2@2939,3505 2995.15,3561.15 U4.52@3211.07,3561.15
KEY_3: P1.3 U4.53 | length 328.6
  Top Layer w10: P1.3@2939,3405 3075.46,3541.46 U4.53@3211.07,3541.46
L_B0: 1.1 U4.26 | length 656.8
  Top Layer w10: U4.26@3640.21,3502.09 3641.3,3501 3766.87,3501 3835.87,3570 3835.87,3673.13 1.1@3708,3801 ; 1.1@3708,3776.47 cw(c3708,3717.26) 3749.87,3759.13 cw(c3791.74,3801) 1.1@3732.53,3801 ; 1.1@3708,3786.47 cw(c3708,3751.4) 3732.8,3776.2 cw(c3757.6,3801) 1.1@3722.53,3801
L_C5: 1.2 U4.25 | length 645.7
  Top Layer w10: U4.25@3640.2,3482.41 3640.79,3483 3774.33,3483 3853.87,3562.54 3853.87,3732.57 3708,3878.44 1.2@3708,3901
LIJU: R25.2 U4.27 | length 1176.7
  Top Layer w10: U4.27@3640.2,3521.78 3712.22,3521.78 v1(3714,3520) ; 3707.29,3521.78 cw(c3707.29,3513.29) v1@3713.29,3519.29 ; v1(3787,3280) 3787,3059 3841.47,3004.53 4045.62,3004.53 4070.53,2979.62 4070.53,2944.38 4045.62,2919.47 3994.01,2919.47 R25.2@3924,2849.46 ; R25.2@3924,2866.12 ccw(c3924,2906.32) 3952.43,2877.89 ; R25.2@3938.68,2851.43 cw(c3969.39,2851.43) 3947.68,2873.14
  Bottom Layer w10: v1(3714,3520) 3723,3511 3723,3325.13 3734.13,3314 3753,3314 v1(3787,3280)
LIJU2: R23.2 U4.15 | length 1268.5
  Top Layer w10: R23.2@3121.54,2761 3154.22,2793.69 3225.5,2793.69 3324.88,2694.31 3324.88,2635.26 3343.53,2616.62 3343.53,2596.33 3383.38,2556.47 3418.62,2556.47 3443.53,2581.38 3443.53,2630.53 3474.12,2661.12 3474.12,2860.54 3523,2909.42 3523,3006 3553.59,3036.59 U4.15@3553.59,3258 ; R23.2@3123.5,2775.68 ccw(c3123.5,2806.39) 3145.21,2784.68 ; R23.2@3138.19,2761 cw(c3178.39,2761) 3149.96,2789.43
MISO: P2.2 U4.22 | length 951.8
  Top Layer w10: U4.22@3640.2,3423.35 3884.65,3423.35 4123,3185 4123,3132 4195,3060 P2.2@4195,3042 ; 4140.4,3114.6 cw(c4067.8,3042) P2.2@4170.47,3042 ; 4157.47,3097.53 cw(c4101.94,3042) P2.2@4180.47,3042 ; 4174.54,3080.46 cw(c4136.09,3042) P2.2@4190.47,3042 ; 4183.86,3071.14 ccw(c4195,3082.29) P2.2@4195,3066.53
MOSI: P2.1 U4.23 | length 770.3
  Top Layer w10: U4.23@3640.21,3443.04 3926.96,3443.04 3985,3385 3985,3352 4141,3196 4141,3155 4154,3142 ; P2.1@4173.39,3130.4 ccw(c4154,3120) 4154,3142 ; P2.1@4173.39,3153.6 cw(c4154,3164) 4154,3142 ; P2.1@4195,3142 4154,3142
Net*4_1: *4.1 C35.2 R44.2 R47.2 | length 889.4
  Top Layer w10: R44.2@3908.5,4506.69 ccw(c3908.5,4529.97) R44.2@3924.97,4513.51 ; R44.2@3908.5,4516.69 ccw(c3908.5,4564.11) 3942.04,4530.58 ; R44.2@3913.46,4502 C35.2@3983.46,4572 4020,4572 ; R44.2@3923.19,4502 cw(c3946.67,4502) 3930.07,4518.6 ; 3955.04,4543.57 ccw(c3926.61,4572) C35.2@3966.81,4572 ; 3959.79,4548.32 cw(c3981.5,4526.61) C35.2@3981.5,4557.32 ; R47.2@3986.46,4399 4105,4399 v2(4106,4400) ; C35.2@3996,4561.81 cw(c4020,4538.66) 4020,4572 ; C35.2@3996,4582.19 ccw(c4020,4605.34) 4020,4572 ; R47.2@3998.82,4388.62 cw(c4023.89,4363.55) 4023.89,4399 cw(c4023.89,4434.45) R47.2@3998.82,4409.38 ; 4097.55,4399 ccw(c4097.55,4408.45) v2@4104.23,4401.77 ; *4.1@4165,4542 4050,4542 4020,4572
  Bottom Layer w10: v2(4106,4400) 4113,4400 4141,4428 ; v2@4106,4402.5 ccw(c4106,4425.44) 4122.22,4409.22 ; *4.1@4165,4542 4165,4452 ; 4141,4428 4154,4428 4165,4439 4165,4452 ; 4141,4428 4165,4452
Net*4_2: *4.2 C36.2 R45.2 R48.2 | length 976
  Bottom Layer w10: R45.2@3975.5,4278.32 cw(c3975.5,4247.61) 3997.21,4269.32 ; R45.2@3975.5,4307.68 ccw(c3975.5,4338.39) 3997.21,4316.68 ; 4001.96,4264.57 cw(c4030.39,4293) 3990.19,4293 cw(c4030.39,4293) 4001.96,4321.43 ; 4009.54,4329.01 cw(c4046.5,4292.06) C36.2@4046.5,4344.32 ; 4026.35,4345.81 ccw(c4013.16,4359) C36.2@4031.81,4359 ; 4026.62,4346.08 cw(c4046.5,4326.2) C36.2@4046.5,4354.32 ; R48.2@4050.46,4228 4038.54,4228 R45.2@3973.54,4293 4039.54,4359 C36.2@4048.46,4359 ; C36.2@4057.78,4346.28 cw(c4074.63,4317.08) 4083.36,4349.65 ; C36.2@4059.24,4347.25 cw(c4083.57,4314.77) 4091.21,4354.62 ; C36.2@4060.82,4348.62 cw(c4085.89,4323.55) 4085.89,4359 cw(c4085.89,4394.45) C36.2@4060.82,4369.38 ; C36.2@4062.59,4367.24 ccw(c4082.38,4380.66) 4077.87,4357.18 ; C36.2@4063.15,4366.34 ccw(c4095.36,4384.94) 4085.73,4349.02 ; C36.2@4068.38,4359 cw(c4068.38,4274.76) *4.2@4135.95,4325.07 ; 4088.3,4359 cw(c4088.3,4289.59) *4.2@4143.97,4331.04 ; 4108.21,4359 cw(c4108.21,4304.42) *4.2@4151.99,4337.01 ; 4117.37,4359 ccw(c4117.37,4378.63) *4.2@4131.25,4364.75 ; *4.2@4127.93,4319.1 ccw(c4048.47,4259.94) C36.2@4048.46,4359 ; *4.2@4156,4340 4137,4359 C36.2@4048.46,4359
Net*4_3: *4.3 C37.2 R46.2 R49.2 | length 673.1
  Bottom Layer w10: R46.2@3967.5,4060.32 cw(c3967.5,4029.61) 3989.21,4051.32 ; R46.2@3967.5,4089.68 ccw(c3967.5,4120.39) 3989.21,4098.68 ; 3993.96,4046.57 cw(c4022.39,4075) 3982.19,4075 cw(c4022.39,4075) 3993.96,4103.43 ; 4003.54,4036.99 ccw(c4040.5,4073.94) R49.2@4040.5,4021.68 ; 4003.54,4113.01 cw(c4040.5,4076.06) C37.2@4040.5,4128.31 ; 4020.35,4020.19 cw(c4007.16,4007) R49.2@4025.81,4007 ; 4020.35,4129.81 ccw(c4007.16,4143) C37.2@4025.81,4143 ; 4020.62,4019.92 ccw(c4040.5,4039.8) R49.2@4040.5,4011.68 ; 4020.62,4130.08 cw(c4040.5,4110.2) C37.2@4040.5,4138.32 ; R49.2@4042.46,4007 4033.54,4007 R46.2@3965.54,4075 4033.54,4143 C37.2@4042.46,4143 ; C37.2@4047.75,4139.69 cw(c4068.54,4118.9) 4068.54,4148.3 ; C37.2@4047.76,4148.3 *4.3@4165,4148.3 ; C37.2@4054.82,4132.62 cw(c4092.68,4094.75) 4092.68,4148.3 ; C37.2@4054.82,4153.38 ccw(c4067.09,4165.66) 4067.09,4148.3
NetC6_2: C6.2 R2.1 R4.2 U1.4 | length 263.1
  Top Layer w30: v11(1680,3290) 1771.54,3290 C6.2@1775,3286.54
  Top Layer w50: U1.4@1495,3286 1656,3286 R2.1@1660,3290
NetC11_1: C11.1 U3.1 | length 118.2
  Top Layer w20: C11.1@1862.54,2970 U3.1@1955.51,2970 ; C11.1@1864.85,2960.58 cw(c1887.58,2937.85) 1887.58,2970
NetC11_2: C11.2 D1.K L1.1 U3.8 | length 791
  Top Layer w20: L1.1@1740,2963.74 1815.2,2888.54 C11.2@1858,2888.54 ; C11.2@1851.15,2881.69 ccw(c1834.62,2865.15) 1834.62,2888.54 ccw(c1834.62,2911.92) C11.2@1851.15,2895.38
  Top Layer w40: L1.1@1740,2963.74 1816.26,3040 1991.57,3040 D1.K@2081.57,3130 ; D1.K@2085,3140 2085,3125 2144.49,3065.51 U3.8@2144.49,2970
NetC15_2: C15.2 R11.2 U4.5 Y1.2 | length 776.3
  Top Layer w10: v1(3345,3140) 3345,3163 3357,3175 3357,3257.74 U4.5@3356.74,3258
  Bottom Layer w10: C15.2@3298.05,2884.38 ccw(c3269.2,2913.24) 3310,2913.24 ; C15.2@3306.46,2874 3310,2877.54 Y1.2@3310,2972 ; 3310,2905.67 ccw(c3340.1,2905.67) C15.2@3318.82,2884.38 ; Y1.2@3325.75,3006.37 ccw(c3325.75,3051.33) 3357.54,3019.54 ; Y1.2@3339.43,2976.41 cw(c3370.4,2986.38) Y1.2@3347.39,3009.39 ; v1(3345,3140) 3310,3105 Y1.2@3310,2972 ; Y1.2@3348.94,2979.47 cw(c3387.9,2992.02) 3358.96,3020.96 ; Y1.2@3358.46,2982.54 cw(c3405.41,2997.66) 3370.53,3032.53 ; R11.2@3362.77,3046.54 cw(c3354.03,3032.54) 3370.54,3032.54 ; R11.2@3370.54,3059 3370.54,3032.54 ; R11.2@3378.31,3046.54 ccw(c3387.04,3032.54) 3370.54,3032.54 ; Y1.2@3310,2972 3370.54,3032.54
NetC16_2: C16.2 R11.1 U4.6 Y1.1 | length 797.6
  Top Layer w10: 3376.42,3149.05 ccw(c3391.05,3149.05) v1@3380.71,3138.71 ; U4.6@3376.42,3258 3376.42,3141.58 v1(3380,3138)
  Bottom Layer w10: v1(3380,3138) 3402,3116 3445,3116 3500,3061 Y1.1@3500,2972 ; R11.1@3437.29,3048.41 cw(c3414.37,3024.54) 3447.46,3024.54 ; R11.1@3447.46,3059 3447.46,3024.54 ; 3452.46,3019.54 ccw(c3484.25,3051.33) Y1.1@3484.25,3006.37 ; Y1.1@3453.51,2987.36 ccw(c3424.69,3001.76) 3447.47,3024.53 ; 3457.28,3014.72 cw(c3437.78,2995.22) Y1.1@3462.45,2982.89 ; R11.1@3457.64,3048.41 ccw(c3480.56,3024.54) 3447.46,3024.54 ; C16.2@3489.12,2887.38 ccw(c3462.85,2913.65) 3500,2913.65 ; C16.2@3497.54,2877 3500,2879.46 Y1.1@3500,2972 ; 3500,2911.26 ccw(c3533.76,2911.26) C16.2@3509.89,2887.38 ; 3447.46,3024.54 Y1.1@3500,2972
NetC23_2: C23.2 P7.1 R16.1 R17.1 | length 648.5
  Top Layer w10: P7.1@3501,2599 3501,2702.93 C23.2@3544.07,2746 R17.1@3544.07,2811 ; 3515.64,2717.57 ccw(c3487.21,2746) C23.2@3527.42,2746 ; 3520.39,2722.32 cw(c3542.1,2700.61) C23.2@3542.1,2731.32 ; C23.2@3533.69,2756.38 ccw(c3508.62,2781.45) 3544.07,2781.45 ccw(c3579.52,2781.45) C23.2@3554.45,2756.38 ; R17.1@3533.69,2800.62 cw(c3508.62,2775.55) 3544.07,2775.55 cw(c3579.52,2775.55) R17.1@3554.45,2800.62
  Bottom Layer w10: P7.1@3501,2599 3540.46,2599 ; P7.1@3522.99,2588.14 cw(c3540.46,2579.52) 3540.46,2599 ; P7.1@3522.99,2609.86 ccw(c3540.46,2618.48) 3540.46,2599 ; 3592.04,2650.57 ccw(c3563.61,2679) R16.1@3603.81,2679 ; 3596.79,2655.32 cw(c3618.5,2633.61) R16.1@3618.5,2664.32 ; R16.1@3620.46,2679 3540.46,2599
NetC24_2: C24.2 P7.2 R18.1 | length 377.6
  Top Layer w10: P7.2@3401,2599 3401,2673.54 ; 3414.75,2687.29 cw(c3430.16,2671.88) C24.2@3433.73,2693.38 ; C24.2@3415.81,2688.35 ccw(c3406.16,2698) C24.2@3419.81,2698 ; C24.2@3428.05,2708.38 ccw(c3400.49,2735.94) 3439.46,2735.94 ; R18.1@3429.08,2773.62 cw(c3404.01,2748.55) 3439.46,2748.55 cw(c3474.92,2748.55) R18.1@3449.85,2773.62 ; C24.2@3432.09,2683.51 ccw(c3426.25,2648.29) 3401,2673.54 ; 3439.46,2730.96 ccw(c3471.4,2730.96) C24.2@3448.82,2708.38 ; R18.1@3439.46,2784 3439.46,2712 3436.46,2709 3401,2673.54
NetC25_2: C25.2 P8.1 R19.1 | length 406.1
  Top Layer w10: R19.1@3841,3068.54 3917.93,3145.46 3944.54,3145.46 ; R19.1@3841,3085.19 ccw(c3841,3125.39) 3869.43,3096.96 ; R19.1@3855.68,3070.5 cw(c3886.39,3070.5) 3864.68,3092.21 ; 3889.25,3116.79 ccw(c3862.54,3143.5) C25.2@3900.32,3143.5 ; 3891.57,3119.11 cw(c3915,3095.68) C25.2@3915,3128.81 ; C25.2@3926.71,3136.6 cw(c3944.53,3123.11) 3944.53,3145.46 ; C25.2@3926.71,3154.33 ccw(c3944.53,3167.82) 3944.53,3145.46 ; P8.1@4028,3062 3944.54,3145.46
NetC26_2: C26.2 P8.2 R20.1 | length 612.9
  Top Layer w10: C26.2@3662,2964.81 cw(c3662,2909.95) 3700.79,2948.74 ; C26.2@3662,2974.81 cw(c3662,2944.09) 3683.72,2965.81 ; C26.2@3662,2981.46 3668.07,2981.46 R20.1@3745,2904.54 3802.46,2962 P8.2@4028,2962 ; C26.2@3676.68,2979.5 ccw(c3692.73,2979.5) C26.2@3681.38,2968.15 ; 3716.57,2932.96 ccw(c3745,2961.39) 3745,2921.19 ccw(c3745,2961.39) 3773.43,2932.96 ; 3721.32,2928.21 cw(c3699.61,2906.5) R20.1@3730.32,2906.5 ; R20.1@3759.68,2906.5 cw(c3790.39,2906.5) 3768.68,2928.21
NetC27_2: C27.2 P7.3 R21.1 R23.1 | length 752.9
  Top Layer w10: R23.1@3190.05,2750.62 cw(c3162.49,2723.06) 3201.46,2723.06 ; C27.2@3191.08,2691.38 ccw(c3166.01,2716.45) 3201.46,2716.45 ccw(c3236.92,2716.45) C27.2@3211.85,2691.38 ; R23.1@3198.46,2761 R23.1@3201.46,2758 ; R23.1@3200.43,2746.32 cw(c3200.43,2715.61) 3222.14,2737.32 ; C27.2@3201.46,2681 R23.1@3201.46,2758 ; 3201.46,2728.04 cw(c3233.4,2728.04) R23.1@3210.82,2750.62 ; R23.1@3215.12,2761 ccw(c3255.32,2761) 3226.89,2732.57 ; P7.3@3288.32,2620 ccw(c3274.76,2642.46) 3301,2642.46 ; P7.3@3301,2599 3301,2642.46 ; P7.3@3313.68,2620 cw(c3327.24,2642.46) 3301,2642.46 ; R23.1@3201.46,2758 3261.46,2698 3261.46,2682 3301,2642.46
  Bottom Layer w10: 3240.04,2653.57 ccw(c3211.61,2682) R21.1@3251.81,2682 ; 3244.79,2658.32 cw(c3266.5,2636.61) R21.1@3266.5,2667.32 ; R21.1@3268.46,2682 3240,2653.54 3240,2618 3259,2599 ; P7.3@3279.64,2586.95 ccw(c3259,2575.31) 3259,2599 ; P7.3@3279.64,2611.05 cw(c3259,2622.69) 3259,2599 ; P7.3@3301,2599 3259,2599
NetC28_2: C28.2 P8.3 R24.1 R25.1 | length 773.2
  Top Layer w10: C28.2@3847,2833.81 cw(c3847,2793.61) 3875.43,2822.04 ; C28.2@3847,2850.46 3924.93,2772.54 3938.54,2772.54 P8.3@4028,2862 ; C28.2@3861.68,2848.5 ccw(c3892.39,2848.5) 3870.68,2826.79 ; 3897.16,2800.31 ccw(c3924,2827.15) 3924,2789.19 ccw(c3924,2864.49) 3977.24,2811.24 ; 3899.67,2797.8 cw(c3876.37,2774.5) R25.1@3909.32,2774.5 ; R25.1@3924,2779.19 ccw(c3924,2830.34) 3960.17,2794.17
  Bottom Layer w10: R24.1@3809,2771.54 3933.08,2771.54 4023.54,2862 P8.3@4028,2862 ; R24.1@3819.38,2761.15 cw(c3844.45,2736.08) 3844.45,2771.54 cw(c3844.45,2806.99) R24.1@3819.38,2781.92
NetC29_1: C29.1 D4.K U5.20 | length 1187.1
  Top Layer w20: C29.1@1809,3707 1896,3794 2092.4,3794 2206.4,3908 2397.6,3908 2437.6,3948 2504,3948 2548,3992 U5.20@2548,4068.12
  Top Layer w30: D4.K@1671.57,3694 1796,3694 C29.1@1809,3707 ; D4.K@1692.29,3673.29 cw(c1742.29,3623.28) 1742.29,3694 cw(c1742.29,3764.72) D4.K@1692.29,3714.71